# Altium PCB board.PcbDoc
Units mil, origin at the board's own origin, x right, y up, seen from the top; angles counter-clockwise.
Board outline 6000 x 4000 mil, 2 copper layers (Top Layer, Bottom Layer); 30 components, 34 nets, 156 pads, 0 vias.
Unrouted connection lines stored in the file: 49.
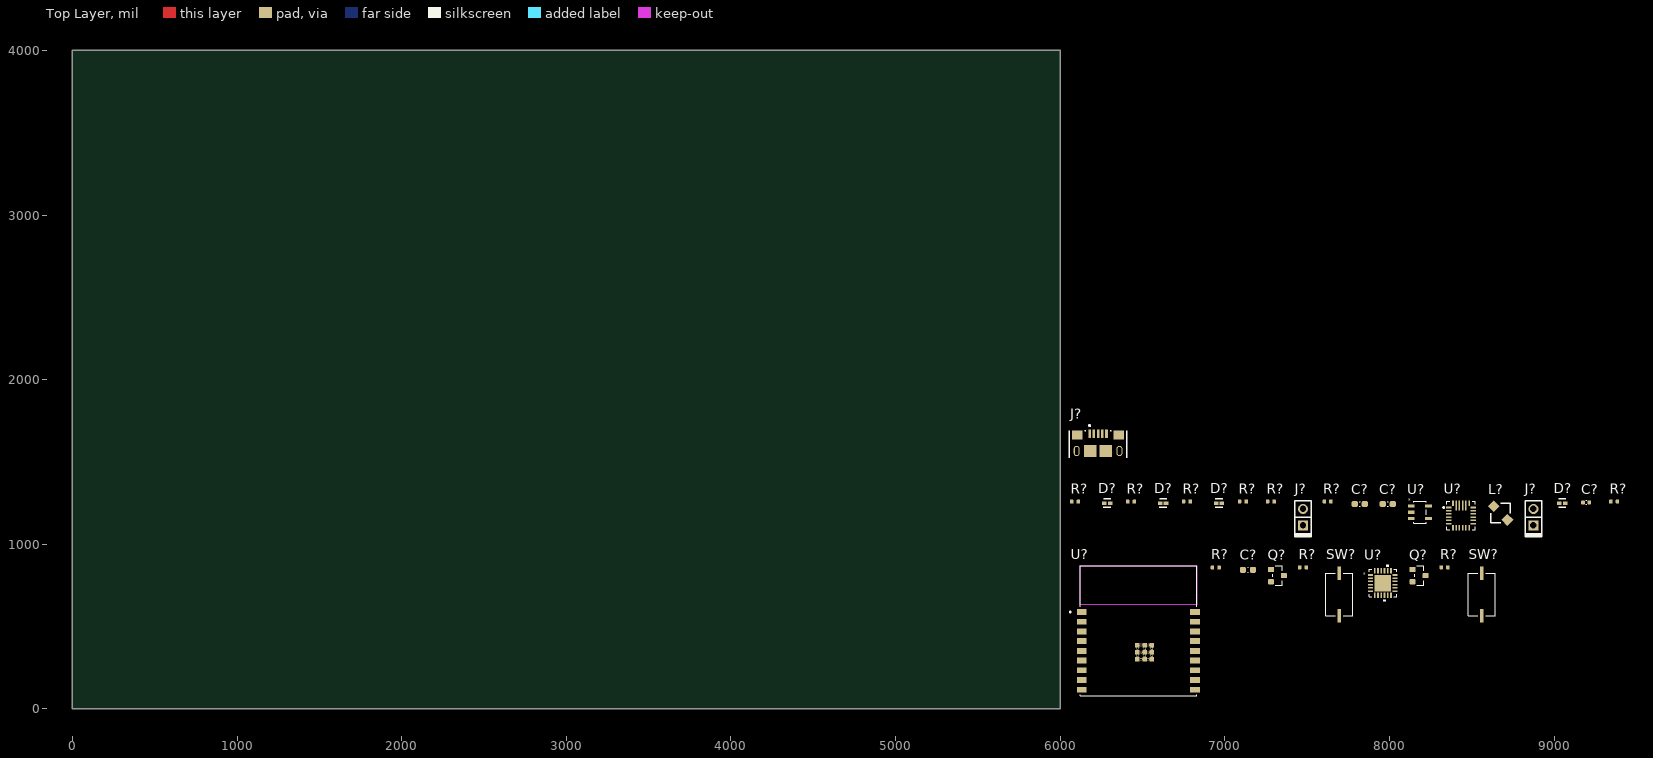
[diagram p0: Top Layer view]
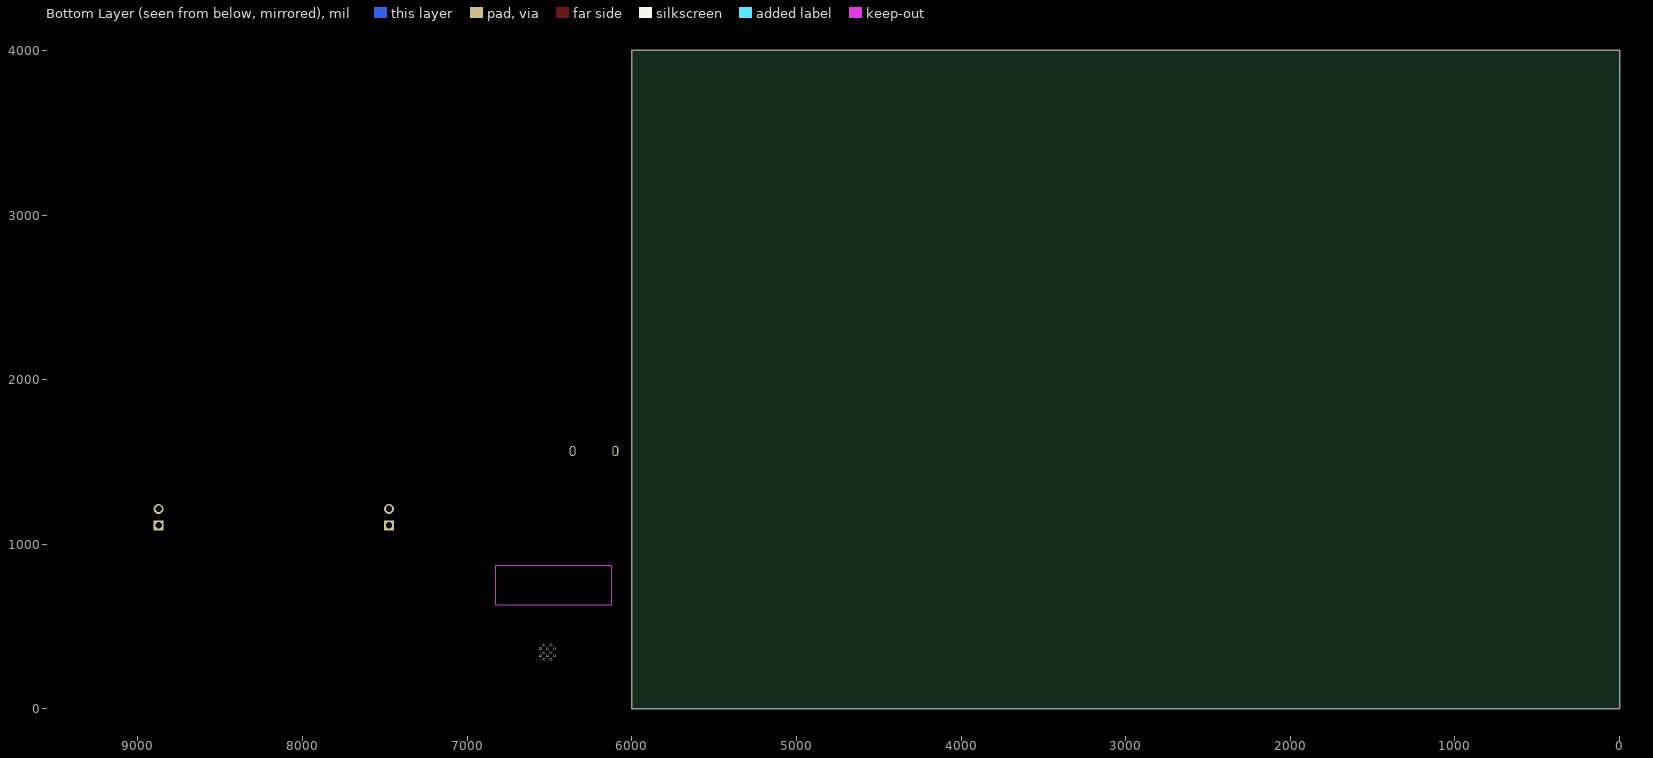
[diagram p1: Bottom Layer view, seen from below]

## Layer stack, top to bottom
Top Solder: solder mask 0.4, Solder Resist, Dk 3.5
Top Layer: signal copper 1.4
Dielectric 1: dielectric 12.6, FR-4, Dk 4.8
Bottom Layer: signal copper 1.4
Bottom Solder: solder mask 0.4, Solder Resist, Dk 3.5

## Board outline
0,0 6000,0 6000,4000 0,4000

## Design rules (kind name [scope] priority, off if disabled: settings)
Clearance [All] p1: gap=10 ignorepadtopadclearanceinfootprint=FALSE except(0: Arc-Hole Track-Hole SMDPad-Hole THPad-Hole Via-Hole Fill-Hole Poly-Hole Region-Hole Text-Hole)
PolygonConnect [All] p1: connectstyle=Relief reliefconductorwidth=10 reliefentries=4 polygonreliefangle="90 Angle" airgapwidth=10
RoomDefinition top [InComponentClass('top')] p1: confinementstyle=ConfineIn formatcopy=TRUE lockcomponents=FALSE outline 6045,1035 9115,1035 9115,1840 6045,1840
RoomDefinition power [InComponentClass('power')] p2: confinementstyle=ConfineIn formatcopy=TRUE lockcomponents=FALSE outline 6045,65 9455,65 9455,1840 6045,1840
RoomDefinition mcu [InComponentClass('mcu')] p3: confinementstyle=ConfineIn formatcopy=TRUE lockcomponents=FALSE outline 6045,65 9455,65 9455,1385 6045,1385
RoutingVias [All] p1: holewidth=28 width=50 viastyle="Through Hole" minholewidth=28 minwidth=50 maxholewidth=28 maxwidth=50
SolderMaskExpansion [All] p1: expansion=4 istentingtop=FALSE
Width [All] p1: maxlimit=10 minlimit=10 preferedwidth=10
30 further rules are at their usual default settings.

## Classes and differential pairs
component class top: D? J?
component class power: C? D? J? L? Q? R? U?
component class mcu: C? Q? R? SW? U?

## Components (designator, comment, footprint, x,y, rotation, side; value= is the part's Value field where it differs from the comment)
C? "Capacitor_Ceramic" C_0603_1608Metric_IPCB 7140,845 r0 top value=10u
C? "Capacitor_Ceramic" C_0603_1608Metric_IPCB 7990,1245 r0 top value=1u
C? "Capacitor_Ceramic" C_0603_1608Metric_IPCB 7820,1245 r0 top value=1u
C? "Capacitor_Ceramic" C_0402_1005Metric_IPCB 9195,1255 r0 top value=120p
D? "Diode_LED" LED_0402 6625,1250 r0 top value=Green
D? "Diode_LED" LED_0402 6285,1250 r0 top value=Green
D? "Diode_LED" LED_0402 9050,1250 r0 top value=Green
D? "Diode_LED" LED_0402 6965,1250 r0 top value=Green
J? "Conn_01x02" PinHeader_1x02_P2.54mm_Vertical 8875,1115 r90 top
J? "Conn_01x02" PinHeader_1x02_P2.54mm_Vertical 7475,1115 r90 top
J? "Amphenol_10118193-0001LF_Micro_USB" Amphenol_10118193-0001LF_Micro_USB 6230,1570 r0 top
L? "Inductor" Sumida_CDRH2D18-HPNP-2R2NC 8675,1190 r0 top value=2u2
Q? "BJT_NPN_BEC" SOT23-3_Standard_IPCB 8180,810 r0 top
Q? "BJT_NPN_BEC" SOT23-3_Standard_IPCB 7320,810 r0 top
R? "Resistor" R_0402_1005Metric_IPCB 7280,1260 r0 top value=10k
R? "Resistor" R_0402_1005Metric_IPCB 7110,1260 r0 top value=47k5
R? "Resistor" R_0402_1005Metric_IPCB 7625,1260 r0 top value=10k
R? "Resistor" R_0402_1005Metric_IPCB 6770,1260 r0 top value=2k49
R? "Resistor" R_0402_1005Metric_IPCB 8335,860 r0 top value=10k
R? "Resistor" R_0402_1005Metric_IPCB 6945,860 r0 top value=1k
R? "Resistor" R_0402_1005Metric_IPCB 7475,860 r0 top value=10k
R? "Resistor" R_0402_1005Metric_IPCB 6090,1260 r0 top value=2k49
R? "Resistor" R_0402_1005Metric_IPCB 6430,1260 r0 top value=2k49
R? "Resistor" R_0402_1005Metric_IPCB 9365,1260 r0 top value=2k49
SW? "SW_Single_NO_BridgingPads" Pushbutton_PTS636_SM25F_SMTR_LFS 8560,695 r90 top
SW? "SW_Single_NO_BridgingPads" Pushbutton_PTS636_SM25F_SMTR_LFS 7695,695 r90 top
U? "CP2102N_QFN24" CP2102N_QFN24 7960,765 r0 top
U? "ESP32-C3-WROOM-02-H4" ESP32-C3-WROOM-02-H4 6475,475 r0 top
U? "MP2637GR" MP2637GR 8435,1175 r0 top
U? "NCP115ASN330T2G" NCP115ASN330T2G 8185,1195 r0 top

## Footprints (in the part's own frame and the unit in brackets; to place one, negate y for a bottom-side part, rotate by r counter-clockwise, add the part's x,y. Pads: shape width x height; smd on the part's side, far side on the other; paste and mask are expansions set on the pad)
Amphenol_10118193-0001LF_Micro_USB [mm]
  rect 0.4x1.35 smd paste+0 mask+0: 1(-1.3,2.605) 2(-0.65,2.605) 3(0,2.605) 4(0.65,2.605) 5(1.3,2.605)
  rect 1.6x1.4 smd paste+0 mask+0: 6(-3.2,2.38) 7(3.2,2.38)
  rrect100% 0.9x1.6 hole 1.2 slot 0.5 at 0 deg paste-1000 mask+0: 8(-3.3,-0.07) 11(3.3,-0.07)
  rect 1.9x1.9 smd paste+0 mask+0: 9(-1.2,-0.07) 10(1.2,-0.07)
  silkscreen extent -4.43,-1.12 4.43,3.98, body extent -4.13,-3.18 4.13,3.38, height 0.25
C_0402_1005Metric_IPCB [mm] "Chip Capacitor, 2-Leads, Body 1.00x0.50mm, IPC Medium Density"
  rrect50% 0.56x0.62 smd: 1(-0.48,0) 2(0.48,0)
  silkscreen extent -0.06,-0.3 0.06,0.3, body extent -0.5,-0.25 0.5,0.25, height 0.5
C_0603_1608Metric_IPCB [mm] "Chip Capacitor, 2-Leads, Body 1.60x0.80mm, IPC Medium Density"
  rrect50% 0.95x0.9 smd: 1(-0.775,0) 2(0.775,0)
  silkscreen extent -0.05,-0.38 0.05,0.38, body extent -0.8,-0.4 0.8,0.4, height 0.8
CP2102N_QFN24 [mil]
  rect 31.81x10.03 smd paste+0 mask+0: 1(-74.41,49.22) 2(-74.41,29.54) 3(-74.41,9.85) 4(-74.41,-9.85) 5(-74.41,-29.54) 6(-74.41,-49.22) 13(74.41,-49.22) 14(74.41,-29.54) 15(74.41,-9.85) 16(74.41,9.85) 17(74.41,29.54) 18(74.41,49.22)
  rect 10.03x31.81 smd paste+0 mask+0: 7(-49.23,-74.41) 8(-29.53,-74.41) 9(-9.84,-74.41) 10(9.84,-74.41) 11(29.53,-74.41) 12(49.23,-74.41) 19(49.23,74.41) 20(29.53,74.41) 21(9.84,74.41) 22(-9.84,74.41) 23(-29.53,74.41) 24(-49.23,74.41)
  rect 100x100 smd paste-49.5 mask+0: 25(0,0)
  silkscreen extent -84,-110 84,110, body extent -79,-79 79,79, height 32
ESP32-C3-WROOM-02-H4 [mm]
  rect 1.5x0.9 smd: 1(-8.75,2.9) 2(-8.75,1.4) 3(-8.75,-0.1) 4(-8.75,-1.6) 5(-8.75,-3.1) 6(-8.75,-4.6) 7(-8.75,-6.1) 8(-8.75,-7.6) 9(-8.75,-9.1) 10(8.75,-9.1) 11(8.75,-7.6) 12(8.75,-6.1) 13(8.75,-4.6) 14(8.75,-3.1) 15(8.75,-1.6) 16(8.75,-0.1) 17(8.75,1.4) 18(8.75,2.9)
  rect 0.7x0.7 smd: 19(-0.14,-2.2) 20(0.96,-2.2) 21(2.06,-2.2) 22(-0.14,-3.3) 23(0.96,-3.3) 24(2.06,-3.3) 25(-0.14,-4.4) 26(0.96,-4.4) 27(2.06,-4.4)
  round 0.4 hole 0.3 mask+0: 28(0.41,-2.2) 29(1.51,-2.2) 30(-0.14,-2.75) 31(0.96,-2.75) 32(2.06,-2.75) 33(0.41,-3.3) 34(1.51,-3.3) 35(-0.14,-3.85) 36(0.96,-3.85) 37(2.06,-3.85) 38(0.41,-4.4) 39(1.51,-4.4)
  Keep-Out Layer region: 9,4 -9,4 -9,10 9,10
  Keep-Out Layer region: 9,4 -9,4 -9,10 9,10
  silkscreen extent -10.6,-10 9,10, body extent -9,-10 9,10, height 3.35
LED_0402 [mm]
  rect 0.7x0.5 smd paste+0 mask+0: 1(-0.45,0) 2(0.45,0)
  silkscreen extent -0.56,-0.63 0.55,0.65, body extent -0.5,-0.25 0.5,0.25, height 0.5
MP2637GR [mil]
  rect 32x10 smd paste+0 mask+0: 1(-74.8,49.21) 2(-74.8,29.53) 3(-74.8,9.84) 4(-74.8,-9.84) 5(-74.8,-29.53) 6(-74.8,-49.21) 13(74.8,-49.21) 14(74.8,-29.53) 15(74.8,-9.84) 16(74.8,9.84) 17(74.8,29.53) 18(74.8,49.21)
  rect 10x32 smd: 7(-49.21,-74.8) 8(-29.53,-74.8) 9(-9.84,-74.8) 10(9.84,-74.8) 11(29.53,-74.8) 12(49.21,-74.8) 19(49.21,74.8) 24(-49.21,74.8)
  rect 10x59 smd: 20(29.53,61.3) 21(9.84,61.3) 22(-9.84,61.3) 23(-29.53,61.3)
  silkscreen extent -110,-86 86,86, body extent -79,-79 79,79, height 43
NCP115ASN330T2G [mil]
  rect 40.28x20 smd paste+0 mask+0: 1(-52.64,37.4) 2(-52.64,0) 3(-52.64,-37.4) 4(52.64,-37.4) 5(52.64,37.4)
  silkscreen extent -38,-67 38,67, body extent -59,-62 59,62, height 43
PinHeader_1x02_P2.54mm_Vertical [mm]
  rect 1.55x1.55 hole 1 paste-1000 mask+0: 1(0,0)
  round 1.55 hole 1 paste-1000 mask+0: 2(2.54,0)
  silkscreen extent -1.78,-1.27 3.81,1.27, body extent -1.27,-1.27 3.81,1.27, height 8.54
Pushbutton_PTS636_SM25F_SMTR_LFS [mil]
  rect 82.81x22.03 smd paste+0 mask+0: 1(-129.85,0) 2(129.85,0)
  silkscreen extent -129,-82 129,82, body extent -159,-77 159,77, height 32
R_0402_1005Metric_IPCB [mm] "Chip Resistor, 2-Leads, Body 1.00x0.50mm, IPC Medium Density"
  rrect50% 0.54x0.64 smd: 1(-0.51,0) 2(0.51,0)
  body extent -0.5,-0.25 0.5,0.25, height 0.35
SOT23-3_Standard_IPCB [mm]
  rrect25% 0.9x0.8 smd paste+0 mask+0: 1(-1,0.95) 2(-1,-0.95) 3(1,0)
  silkscreen extent -0.7,-1.52 0.7,1.52, body extent -1.25,-1.5 1.25,1.5, height 1.2
Sumida_CDRH2D18-HPNP-2R2NC [mm]
  rect 1.3x1.3 smd rot 135 paste+0 mask+0: 1(-1.061,1.061) 2(1.061,-1.061)
  silkscreen extent -1.5,-1.5 1.5,1.5, body extent -2.08,-2.08 2.08,2.08, height 0.25

## Part data
C?: library part 20014, "16V 10u 0603 X5R", Package=0603, Internal Number=20014
C? C?: library part 20016, "16V 1u 0603 X7R", Package=0603, Internal Number=20016
C?: library part 20015, "50V 120p 0402 X7R", Package=0402, Internal Number=20015
D? D? D? D?: library part 40002, "LED 0402 Green", Package=0402, Internal Number=40002
J? J?: library part 110001, "01x02 P2.54 PinHeader", Internal Number=110001
J?: library part 110003, "Micro USB B SMD Horisontal", Manufacturer="Amphenol ICC / FCI", Manufacturer P/N=10118193-0001LF, Internal Number=110003
L?: library part 190001, "Inductor 2.2uH 1.6A 60mOhm", Manufacturer=Sumida, Manufacturer P/N=CDRH2D18-HPNP-2R2NC, Internal Number=190001
Q? Q?: library part 50001, "TRANS NPN 30V 100MA SOT23-3", Manufacturer=onsemi, Manufacturer P/N=BC848BLT3G, Package=SOT23-3, Internal Number=50001
R? R? R? R?: library part 10033, "0402 10k 1%", Package=0402, Internal Number=10033
R?: library part 10034, "0402 47k5 1%", Package=0402, Internal Number=10034
R? R? R? R?: library part 10021, "0402 2k49 1%", Package=0402, Internal Number=10021
R?: library part 10009, "0402 1k 1%", Package=0402, Internal Number=10009
SW? SW?: library part 100001, Manufacturer=C&K, Manufacturer P/N="PTS636 SM25F SMTR LFS", Internal Number=100001
U?: library part 90002, "USB to UART", Manufacturer="Silicon Labs", Manufacturer P/N=CP2102N-A02-GQFN24, Package=QFN24, Internal Number=90002
U?: library part 130001, "ESP32 C3 SoC", Package=SoC, Internal Number=130001
U?: library part 180003, "MP2637GR Li-ion charger", Manufacturer="Monolithic Power Systems", Manufacturer P/N=MP2637GR-P, Package=QFN, Internal Number=180003
U?: library part 80001, "3V3 LDO 300mA", Manufacturer=onsemi, Package=TSOP5, Internal Number=80001, Manufacturer P/N=NCP115ASN330T2G

## Nets (pads, with @x,y where several pads share a name; then routed paths per layer and width w, separated by ;. In a path a pad name is that pad's centre, name@x,y a point inside that pad or via, vN(x,y) a via of type N, cw(c..) or ccw(c..) an arc to the next point about the centre after c; other vN are vias at no path point)
3V3: R?.1@6924.92,860
\ACOK: D?.1@6607.28,1250 U?.11@8464.53,1100.2
\BOOST: D?.1@6267.28,1250 U?.3@8360.2,1184.84
\CHG: D?.1@6947.28,1250 U?.2@8360.2,1204.53
CSP: L?.2 U?.4@8360.2,1165.16
D-: Q?.1@8140.63,847.4
DTR: Q?.2@7280.63,772.6 R?.1@8314.92,860 U?.23@7930.47,839.41
EN: SW?.1@8560,565.15
FB: C?.1@9176.1,1255 U?.10@8444.84,1100.2
GND: C?.1@7109.49,845 C?.1@7789.49,1245 C?.1@7959.49,1245 D?.1@9032.28,1250 J?.2@7475,1215 J?.2@8875,1215 J?.6 J?.7 J?.8 J?.9 J?.10 J?.11 Q?.3@8219.37,810 R?.1@7089.92,1260 SW?.2 U?.1@8360.2,1224.21 U?.2@7885.59,794.54 U?.2@8132.36,1195 U?.6@8360.2,1125.79 U?.23@8405.47,1236.3 U?.24@8385.79,1249.8 U?.25@7960,765
GPIO9: Q?.3@7359.37,810 SW?.1@7695,565.15
ILIM: U?.15@8509.8,1165.16
ISET: R?.2@7130.08,1260 U?.8@8405.47,1100.2
MODE: U?.19@8484.21,1249.8
NetD?_2: D?.2@6982.72,1250 R?.1@6749.92,1260
NetQ?_1: Q?.1@7280.63,847.4 R?.2@7495.08,860
NetQ?_2: 
NetR?_2: R?.2@6965.08,860 U?.9@7950.16,690.59
NTC: J?.1@7475,1115 R?.1@7604.92,1260 U?.9@8425.16,1100.2
OLIM: U?.7@8385.79,1100.2
PWIN: U?.14@8509.8,1145.47
REG: R?.1@7259.92,1260 U?.12@8484.21,1100.2
RTS: Q?.2@8140.63,772.6 R?.1@7454.92,860 U?.19@8009.23,839.41
RXD: U?.20@7989.53,839.41
SW: L?.1 U?.22@8425.16,1236.3
SYS: C?.2@7850.51,1245 R?.2@7645.08,1260 U?.1@8132.36,1232.4 U?.3@8132.36,1157.6
TMR: U?.13@8509.8,1125.79
TXD: U?.21@7969.84,839.41
USB_D_N: U?.4@7885.59,755.15
USB_D_P: U?.3@7885.59,774.85
VBATT: J?.1@8875,1115 U?.5@8360.2,1145.47
VBUS: U?.8@7930.47,690.59
VCC: R?.2@6110.08,1260 R?.2@6450.08,1260 R?.2@6790.08,1260 U?.16@8509.8,1184.84
VIN: C?.2@7170.51,845 R?.2@7300.08,1260 U?.20@8464.53,1236.3
pads on no net: C?.2@8020.51,1245 C?.2@9213.9,1255 D?.2@6302.72,1250 D?.2@6642.72,1250 D?.2@9067.72,1250 J?.1@6178.82,1672.56 J?.2@6204.41,1672.56 J?.3 J?.4 J?.5 R?.1@6069.92,1260 R?.1@6409.92,1260 R?.1@9344.92,1260 R?.2@8355.08,860 R?.2@9385.08,1260 U?.1@6130.51,589.17 U?.1@7885.59,814.22 U?.2@6130.51,530.12 U?.3@6130.51,471.06 U?.4@6130.51,412.01 U?.4@8237.64,1157.6 U?.5@6130.51,352.95 U?.5@7885.59,735.46 U?.5@8237.64,1232.4 U?.6@6130.51,293.9 U?.6@7885.59,715.78 U?.7@6130.51,234.84 U?.7@7910.77,690.59 U?.8@6130.51,175.79 U?.9@6130.51,116.73 U?.10@6819.49,116.73 U?.10@7969.84,690.59 U?.11@6819.49,175.79 U?.11@7989.53,690.59 U?.12@6819.49,234.84 U?.12@8009.23,690.59 U?.13@6819.49,293.9 U?.13@8034.41,715.78 U?.14@6819.49,352.95 U?.14@8034.41,735.46 U?.15@6819.49,412.01 U?.15@8034.41,755.15 U?.16@6819.49,471.06 U?.16@8034.41,774.85 U?.17 U?.18 U?.19@6469.49,388.39 U?.20@6512.8,388.39 U?.21@6556.1,388.39 U?.21@8444.84,1236.3 U?.22@6469.49,345.08 U?.22@7950.16,839.41 U?.23@6512.8,345.08 U?.24@6556.1,345.08 U?.24@7910.77,839.41 U?.25@6469.49,301.77 U?.26 U?.27 U?.28 U?.29 U?.30 U?.31 U?.32 U?.33 U?.34 U?.35 U?.36 U?.37 U?.38 U?.39

## Text inside footprints (layer, text, board x,y; h text height)
U?: Top Assembly "*" at 8150,1204.4 h50; Top Overlay "*" at 8115,1255 h19.68
U?: Top Assembly "*" at 7889,799.07 h50; Top Overlay "*" at 7840,805 h19.68